# EAGLE board LiPo Charger-Balancer (EAGLE 4.11)
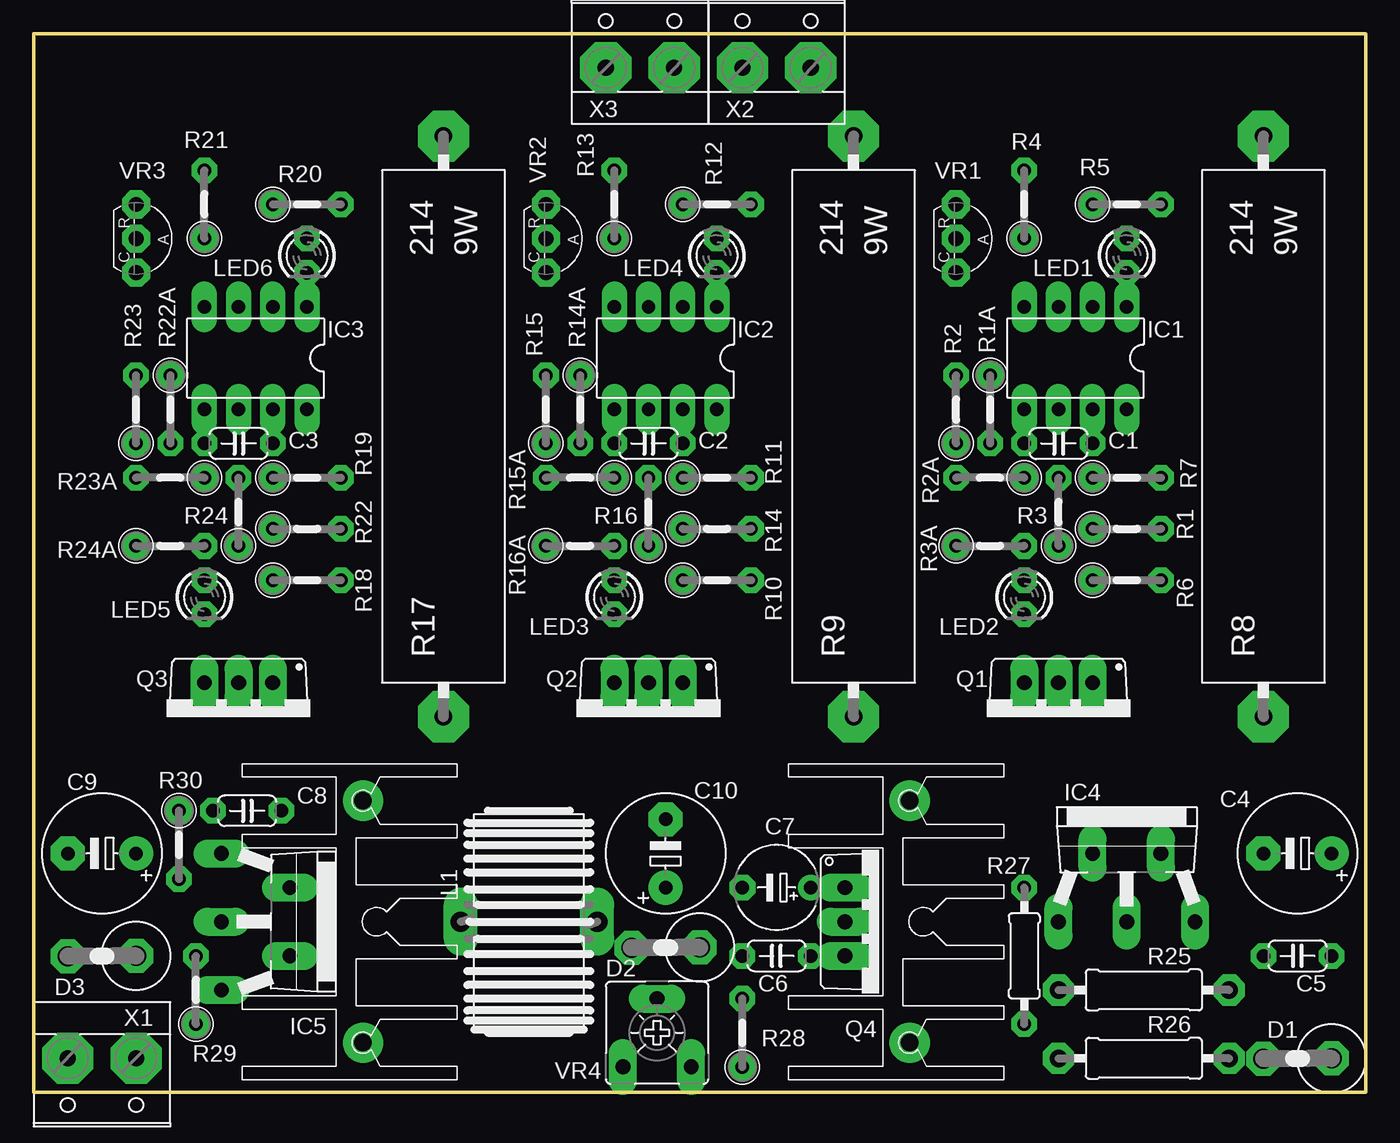
[diagram p0: board, top side]
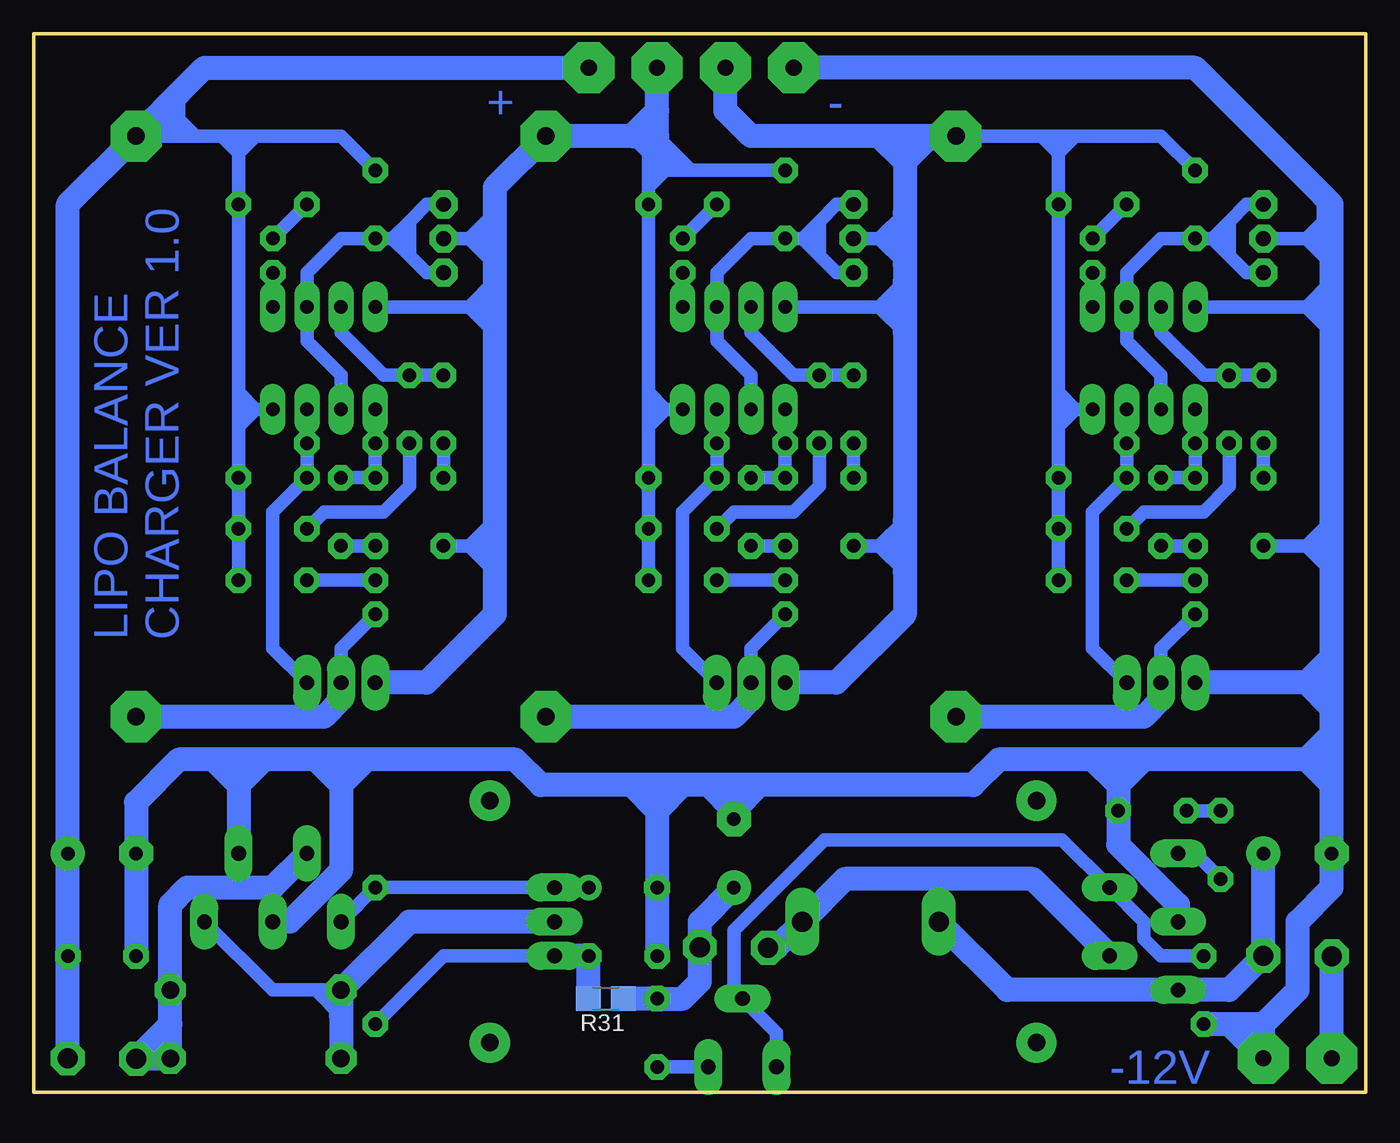
[diagram p1: board, bottom side, seen from below]

Size 99.06 x 78.74 mm. Coordinates in mm from the lower left corner, seen from the top.
Outline: 99.06,0 0,0 0,78.74 99.06,78.74 99.06,0
Copper layers (1*16): Top 0.035mm / dielectric 1.5mm / Bottom 0.035mm
Design rules "default": minimum track width 10mil, minimum drill 24mil, track to track 8mil, track to pad 8mil, pad to pad 8mil, via to via 8mil, smd to smd 8mil, copper to edge 0mil, drill to drill 8mil, minimum pad ring 10mil, minimum via ring 8mil, stop-mask expansion 4mil, vias tented up to drill 0mil, thermal gap 10mil

## Footprints (pad centres in the part's own frame; a part is rotated, then mirrored left to right if it is on the bottom)
C050-024X044 = drill 1 octagon: 1 -2.54,0; 2 2.54,0
E5-8,5 = drill 1 pad 2.54 round: + -2.54,0 | drill 1 pad 2.54 octagon: - 2.54,0
E5-6 = drill 1 pad 1.905 round: + -2.54,0 | drill 1 pad 1.905 octagon: - 2.54,0
RAD5G = drill 1.5 octagon: A 2.54,0.025; C -2.54,0
HEATSINK = drill 1.3 pad 3 round: G1 -9,-1; G2 9,-1
DIL08 = drill 1 long: 1 -3.81,-3.81; 2 -1.27,-3.81; 3 1.27,-3.81; 4 3.81,-3.81; 5 3.81,3.81; 6 1.27,3.81; 7 -1.27,3.81; 8 -3.81,3.81
TO220-5 = drill 1.1 long: 1 -5.08,-5.08; 2 -2.54,0; 3 0,-5.08; 4 2.54,0; 5 5.08,-5.08
SFT830S = drill 1.5 long: 1 -5.08,0; 2 5.08,0
LED3MM = drill 1 octagon: A -1.27,0; K 1.27,0
TO220BV = drill 1.1 long: D 0,-2.54; G -2.54,-2.54; S 2.54,-2.54
TO220AV = drill 1.1 long: B -2.54,-2.54; C 0,-2.54; E 2.54,-2.54
0207/5V = drill 1 octagon: 1 -2.54,0; 2 2.54,0
KH214-8 = drill 1.3 pad 3.81 octagon: 1 -21.59,0; 2 21.59,0
0309/12 = drill 1.3 octagon: 1 -6.35,0; 2 6.35,0
0207/10 = drill 1 octagon: 1 -5.08,0; 2 5.08,0
R1206 = smd 1.8 x 1.8: 1 -1.3,0; 2 1.3,0
TO92-CLP = drill 1.1 octagon: A 0,0; C 2.54,0; R -2.54,0
CA6V = drill 1.1 long: A -2.54,-2.54; E 2.54,-2.54; S 0,2.54
W237-132 = drill 1.2 pad 3.81 octagon: 1 -2.54,-0.635; 2 2.54,-0.635

## Placement (x,y rotation side)
C1  330n  [C050-024X044]  76.2,48.26 0 top
C2  330n  [C050-024X044]  45.72,48.26 0 top
C3  330n  [C050-024X044]  15.24,48.26 0 top
C4  10µF  [E5-8,5]  93.98,17.78 180 top
C5  100n  [C050-024X044]  93.98,10.16 180 top
C6  100n  [C050-024X044]  55.24,10.16 180 top
C7  10µF  [E5-6]  55.24,15.24 180 top
C8  100p  [C050-024X044]  15.88,20.95 0 top
C9  470µF  [E5-8,5]  5.08,17.78 180 top
C10  470µF  [E5-8,5]  46.99,17.78 90 top
D1  3A  [RAD5G]  93.98,2.54 180 top
D2  3A  [RAD5G]  46.99,10.79 180 top
D3  3A  [RAD5G]  5.08,10.16 180 top
HS1  [HEATSINK]  23.5,12.7 90 top
HS2  [HEATSINK]  64.14,12.7 90 top
IC1  LM2903N  [DIL08]  77.47,54.61 180 top
IC2  LM2903N  [DIL08]  46.99,54.61 180 top
IC3  LM2903N  [DIL08]  16.51,54.61 180 top
IC4  L200  [TO220-5]  81.28,17.78 0 top
IC5  LM2577T-ADJ  [TO220-5]  19.05,12.7 270 top
L1  150µH  [SFT830S]  36.83,12.7 0 top
LED1  RED  [LED3MM]  81.28,62.23 270 top
LED2  GREEN  [LED3MM]  73.66,36.83 270 top
LED3  GREEN  [LED3MM]  43.18,36.83 270 top
LED4  RED  [LED3MM]  50.8,62.23 270 top
LED5  GREEN  [LED3MM]  12.7,36.83 270 top
LED6  RED  [LED3MM]  20.32,62.23 270 top
Q1  IRFZ48N  [TO220BV]  76.2,27.94 180 top
Q2  IRFZ48N  [TO220BV]  45.72,27.94 180 top
Q3  IRFZ48N  [TO220BV]  15.24,27.94 180 top
Q4  BD912  [TO220AV]  62.87,12.7 270 top
R1  15k  [0207/5V]  81.28,41.91 0 top
R1A  22k  [0207/5V]  71.12,50.8 270 top
R2  22k  [0207/5V]  68.58,50.8 90 top
R2A  33k  [0207/5V]  71.12,45.72 180 top
R3  68k  [0207/5V]  76.2,43.18 90 top
R3A  68k  [0207/5V]  71.12,40.64 0 top
R4  120R  [0207/5V]  73.66,66.04 90 top
R5  120R  [0207/5V]  81.28,66.04 0 top
R6  120R  [0207/5V]  81.28,38.1 0 top
R7  10k  [0207/5V]  81.28,45.72 0 top
R8  2R2  [KH214-8]  91.44,49.53 90 top
R9  2R2  [KH214-8]  60.96,49.53 90 top
R10  120R  [0207/5V]  50.8,38.1 0 top
R11  10k  [0207/5V]  50.8,45.72 0 top
R12  120R  [0207/5V]  50.8,66.04 0 top
R13  120R  [0207/5V]  43.18,66.04 90 top
R14  15k  [0207/5V]  50.8,41.91 0 top
R14A  22k  [0207/5V]  40.64,50.8 270 top
R15  22k  [0207/5V]  38.1,50.8 90 top
R15A  33k  [0207/5V]  40.64,45.72 180 top
R16  68k  [0207/5V]  45.72,43.18 90 top
R16A  68k  [0207/5V]  40.64,40.64 0 top
R17  2R2  [KH214-8]  30.48,49.53 90 top
R18  120R  [0207/5V]  20.32,38.1 0 top
R19  10k  [0207/5V]  20.32,45.72 0 top
R20  120R  [0207/5V]  20.32,66.04 0 top
R21  120R  [0207/5V]  12.7,66.04 90 top
R22  15k  [0207/5V]  20.32,41.91 0 top
R22A  22k  [0207/5V]  10.16,50.8 270 top
R23  22k  [0207/5V]  7.62,50.8 90 top
R23A  33k  [0207/5V]  10.16,45.72 180 top
R24  68k  [0207/5V]  15.24,43.18 90 top
R24A  68k  [0207/5V]  10.16,40.64 0 top
R25  R25  [0309/12]  82.55,7.62 180 top
R26  R25  [0309/12]  82.55,2.54 180 top
R27  2R5  [0207/10]  73.66,10.16 90 top
R28  10k  [0207/5V]  52.7,4.45 90 top
R29  1k5  [0207/5V]  12.06,7.62 90 top
R30  820  [0207/5V]  10.79,18.41 270 top
R31  0R  [R1206]  56.52,6.99 180 bottom
VR1  [TO92-CLP]  68.58,63.5 270 top
VR2  [TO92-CLP]  38.1,63.5 270 top
VR3  [TO92-CLP]  7.62,63.5 270 top
VR4  10k  [CA6V]  46.35,4.45 0 top
X1  [W237-132]  5.08,1.91 180 top
X2  [W237-132]  55.24,76.83 0 top
X3  [W237-132]  45.09,76.83 0 top

## Library data of the parts
C1-C10 D1-D3 HS1 HS2 IC1-IC5 L1 LED1-LED6 Q1-Q4 R1 R1A R2 R2A R3 R3A R4-R14 R14A R15 R15A R16 R16A R17-R22 R22A R23 R23A R24 R24A R25-R31 VR1-VR4 X1-X3 = LiPo Charger-Balancer

## Nets
BAT+: D3.A X1.2
CT1: IC1.4 IC2.8 Q1.S R3A.1 R9.2 R10.2 R11.2 R12.2 R13.2 R14.2 VR1.A X2.1
CT2: IC2.4 IC3.8 Q2.S R16A.1 R17.2 R18.2 R19.2 R20.2 R21.2 R22.2 VR2.A X3.2
N$1: IC1.2 IC1.6 R4.1 VR1.C VR1.R
N$2: C1.2 IC1.7 Q1.G R7.1
N$3: LED2.K Q1.D R8.1
N$4: IC2.2 IC2.6 R13.1 VR2.C VR2.R
N$5: LED2.A R6.1
N$6: C2.2 IC2.7 Q2.G R11.1
N$7: C1.1 IC1.5 R2A.1 R3.2
N$8: IC1.1 LED1.K
N$9: R1.1 R1A.2
N$10: LED1.A R5.1
N$11: IC1.3 R1A.1 R2.2
N$12: R2.1 R2A.2
N$13: R3.1 R3A.2
N$14: LED3.K Q2.D R9.1
N$15: LED3.A R10.1
N$16: C2.1 IC2.5 R15A.1 R16.2
N$17: IC2.1 LED4.K
N$18: LED4.A R12.1
N$19: R14.1 R14A.2
N$20: IC2.3 R14A.1 R15.2
N$21: R15.1 R15A.2
N$22: R16.1 R16A.2
N$23: IC3.2 IC3.6 R21.1 VR3.C VR3.R
N$24: C3.2 IC3.7 Q3.G R19.1
N$25: LED5.K Q3.D R17.1
N$26: LED5.A R18.1
N$27: C3.1 IC3.5 R23A.1 R24.2
N$28: IC3.1 LED6.K
N$29: LED6.A R20.1
N$30: R22.1 R22A.2
N$31: IC3.3 R22A.1 R23.2
N$32: R23.1 R23A.2
N$33: R24.1 R24A.2
N$34: C7.+ IC4.1 Q4.B R27.2
N$35: D1.A IC4.2 R25.1 R26.1
N$36: IC4.5 Q4.C R25.2 R26.2
N$37: R28.1 VR4.E
N$38: C9.+ D3.C IC5.5 L1.1
N$39: D2.A IC5.4 L1.2
N$40: IC5.2 R29.2 VR4.A VR4.S
N$41: C10.+ D2.C R28.2 R31.1
N$42: C6.1 Q4.E R27.1 R31.2
N$44: IC5.1 R30.2
N$45: C8.1 R30.1
V+: C4.+ C5.1 D1.C IC1.8 R1.2 R4.2 R5.2 R6.2 R7.2 R8.2 X2.2
V-: C4.- C5.2 C6.2 C7.- C8.2 C9.- C10.- IC3.4 IC4.3 IC4.4 IC5.3 Q3.S R24A.1 R29.1 VR3.A X1.1 X3.1

## Tracks (layer width: path | path; a pad name or v marks a point on that pad's centre or on a via)
BAT+
  Bottom 1.016: D3.A 2.54,10.16
  Bottom 1.778: X1.2 D3.A
CT1
  Bottom 1.016: R10.2 R14.2 R11.2 53.34,49.53 | 53.34,49.53 53.34,50.8 | 53.34,50.8 52.07,50.8 | 52.07,50.8 IC2.8 | 53.34,50.8 53.34,52.07 | 53.34,52.07 R12.2 53.34,67.31 | 53.34,68.58 52.07,68.58 | 52.07,68.58 51.44,68.58 | 51.44,68.58 50.16,68.58 | 53.34,68.58 53.34,69.85 | 53.34,69.85 53.34,70.48 | 53.34,70.48 52.7,71.12 50.16,68.58 | 53.34,67.31 53.34,68.58 | 64.77,63.5 66.67,63.5 | 64.77,58.42 66.67,58.42 | 66.67,58.42 IC1.4 | 64.77,40.64 R3A.1 66.67,40.64 | 64.77,60.33 66.67,58.42 | 66.67,58.42 64.77,56.52 | 64.77,65.41 66.67,63.5 | 66.67,63.5 VR1.A | 66.67,63.5 64.77,61.59 | 64.77,42.55 66.67,40.64 | 66.67,40.64 64.77,38.73 | 52.07,68.58 53.34,69.85 | 51.44,68.58 53.34,70.48 | 50.16,68.58 R13.2 | 53.34,67.31 52.07,68.58 | 53.34,69.85 54.61,71.12 | 52.07,50.8 53.34,52.07 | 53.34,49.53 52.07,50.8
  Bottom 1.778: 54.61,71.12 52.7,71.12 52.7,73.03 | 54.61,71.12 R9.2 64.77,67.31 64.77,65.41 64.77,63.5 64.77,61.59 64.77,60.33 64.77,58.42 64.77,56.52 64.77,42.55 64.77,40.64 64.77,38.73 64.77,35.56 69.85,30.48 Q1.S | 52.7,73.03 X2.1 | 54.61,71.12 52.7,73.03
CT2
  Bottom 1.016: 22.86,50.8 22.86,52.07 | 22.86,52.07 R20.2 22.86,69.85 | 22.86,49.53 R19.2 R22.2 R18.2 | 22.86,49.53 22.86,50.8 | 22.86,50.8 21.59,50.8 | 21.59,50.8 IC3.8 | 22.86,69.85 22.86,71.12 | 22.86,71.12 21.59,71.12 | 21.59,71.12 15.24,71.12 R21.2 | 22.86,71.12 24.13,71.12 | 24.13,71.12 R17.2 | 34.29,58.42 36.2,58.42 | 36.2,58.42 IC2.4 | 34.29,40.64 36.2,40.64 | 36.2,40.64 R16A.1 | 34.29,63.5 36.2,63.5 | 36.2,63.5 VR2.A | 22.86,69.85 21.59,71.12 | 22.86,69.85 24.13,71.12 | 34.29,65.41 36.2,63.5 | 36.2,63.5 34.29,61.59 | 34.29,60.33 36.2,58.42 | 36.2,58.42 34.29,56.52 | 34.29,42.55 36.2,40.64 | 36.2,40.64 34.29,38.73 | 21.59,50.8 22.86,52.07 | 22.86,49.53 21.59,50.8
  Bottom 1.778: 34.29,71.12 34.29,69.22 | 34.29,69.22 34.29,65.41 34.29,63.5 34.29,61.59 34.29,60.33 34.29,58.42 34.29,56.52 34.29,42.55 34.29,40.64 34.29,38.73 34.29,35.56 39.37,30.48 Q2.S | R17.2 32.38,71.12 | 32.38,71.12 34.29,71.12 | X3.2 47.62,73.03 45.72,71.12 36.2,71.12 | 34.29,71.12 36.2,71.12 | 32.38,71.12 34.29,69.22 | 34.29,69.22 36.2,71.12
N$1
  Bottom 1.016: 72.39,63.5 R4.1 76.2,63.5 78.74,60.96 IC1.2 78.74,55.88 76.2,53.34 IC1.6 | 72.39,63.5 71.12,63.5 | 71.12,63.5 71.12,64.77 | 71.12,64.77 69.85,66.04 VR1.R | 71.12,63.5 71.12,62.23 | 71.12,62.23 69.85,60.96 VR1.C | 72.39,63.5 71.12,64.77 | 72.39,63.5 71.12,62.23
N$2
  Bottom 1.016: IC1.7 C1.2 R7.1 81.28,43.18 81.28,33.02 Q1.G
N$3
  Bottom 1.016: Q1.D 76.2,33.02 LED2.K
  Bottom 1.778: R8.1 77.47,27.94 76.2,29.21 Q1.D
N$4
  Bottom 1.016: 41.91,63.5 R13.1 45.72,63.5 48.26,60.96 IC2.2 48.26,55.88 45.72,53.34 IC2.6 | 41.91,63.5 40.64,63.5 | 40.64,63.5 40.64,64.77 | 40.64,64.77 39.37,66.04 VR2.R | 40.64,63.5 40.64,62.23 | 40.64,62.23 39.37,60.96 VR2.C | 41.91,63.5 40.64,64.77 | 41.91,63.5 40.64,62.23
N$5
  Bottom 1.016: LED2.A R6.1
N$6
  Bottom 1.016: IC2.7 C2.2 R11.1 50.8,43.18 50.8,33.02 Q2.G
N$7
  Bottom 1.016: IC1.5 C1.1 R2A.1 R3.2
N$8
  Bottom 1.016: IC1.1 LED1.K
N$9
  Bottom 1.016: R1.1 77.47,43.18 73.03,43.18 71.12,45.09 R1A.2
N$10
  Bottom 1.016: R5.1 LED1.A
N$11
  Bottom 1.016: R2.2 R1A.1 73.03,53.34 76.2,56.52 IC1.3
N$12
  Bottom 1.016: R2A.2 R2.1
N$13
  Bottom 1.016: R3A.2 R3.1
N$14
  Bottom 1.016: Q2.D 45.72,33.02 LED3.K
  Bottom 1.778: R9.1 46.99,27.94 45.72,29.21 Q2.D
N$15
  Bottom 1.016: LED3.A R10.1
N$16
  Bottom 1.016: IC2.5 C2.1 R15A.1 R16.2
N$17
  Bottom 1.016: IC2.1 LED4.K
N$18
  Bottom 1.016: R12.1 LED4.A
N$19
  Bottom 1.016: R14A.2 40.64,45.09 42.55,43.18 46.99,43.18 R14.1
N$20
  Bottom 1.016: IC2.3 45.72,56.52 42.55,53.34 R14A.1 R15.2
N$21
  Bottom 1.016: R15A.2 R15.1
N$22
  Bottom 1.016: R16A.2 R16.1
N$23
  Bottom 1.016: IC3.6 15.24,53.34 17.78,55.88 IC3.2 17.78,60.96 15.24,63.5 R21.1 11.43,63.5 | 11.43,63.5 10.16,63.5 | 10.16,63.5 10.16,64.77 | 10.16,64.77 8.89,66.04 VR3.R | 10.16,63.5 10.16,62.23 | 10.16,62.23 8.89,60.96 VR3.C | 11.43,63.5 10.16,64.77 | 11.43,63.5 10.16,62.23
N$24
  Bottom 1.016: IC3.7 C3.2 R19.1 20.32,43.18 20.32,33.02 Q3.G
N$25
  Bottom 1.016: Q3.D 15.24,33.02 LED5.K
  Bottom 1.778: R17.1 16.51,27.94 15.24,29.21 Q3.D
N$26
  Bottom 1.016: LED5.A R18.1
N$27
  Bottom 1.016: R24.2 R23A.1 C3.1 IC3.5
N$28
  Bottom 1.016: IC3.1 LED6.K
N$29
  Bottom 1.016: R20.1 LED6.A
N$30
  Bottom 1.016: R22.1 16.51,43.18 12.06,43.18 10.16,45.09 R22A.2
N$31
  Bottom 1.016: IC3.3 15.24,56.52 12.06,53.34 R22A.1 R23.2
N$32
  Bottom 1.016: R23A.2 R23.1
N$33
  Bottom 1.016: R24A.2 R24.1
N$34
  Bottom 1.016: IC4.1 R27.2 Q4.B C7.+
N$35
  Bottom 1.016: D1.A 91.44,2.54
  Bottom 1.778: IC4.2 81.28,15.24 87.63,15.24 88.9,13.97 R25.1 88.9,5.08 | 88.9,5.08 R26.1 91.44,2.54 88.9,5.08
N$36
  Bottom 1.016: IC4.5 81.28,7.62 78.11,7.62 | R25.2 78.11,7.62 | 78.11,7.62 76.2,5.71
  Bottom 1.778: R26.2 76.2,5.71 R25.2 71.12,12.7 Q4.C
N$37
  Bottom 1.016: VR4.E R28.1
N$38
  Bottom 1.778: C9.+ D3.C 10.16,7.62 IC5.5 26.67,7.62 L1.1
N$39
  Bottom 0.406: 44.45,10.79 D2.A
  Bottom 1.778: 44.45,10.79 43.81,10.79 L1.2 38.73,15.88 24.77,15.88 IC5.4
N$40
  Bottom 1.016: R29.2 15.24,10.16 16.51,11.43 16.51,12.7 IC5.2 22.61,18.8 40.26,18.8 46.99,12.06 46.99,7.62 VR4.S 43.81,4.45 VR4.A
N$41
  Bottom 1.778: R31.1 R28.2 50.8,6.99 49.53,8.26 D2.C 49.53,12.7 C10.+
N$42
  Bottom 0.406: 57.81,10.13 C6.1
  Bottom 1.016: R27.1 68.58,10.16 Q4.E C6.1
  Bottom 1.778: C6.1 Q4.E | C6.1 Q4.E | C6.1 Q4.E | R31.2 57.81,10.13
N$44
  Bottom 1.016: R30.2 12.7,17.78 IC5.1
N$45
  Bottom 1.016: R30.1 C8.1
V+
  Bottom 1.016: 83.82,71.12 83.82,69.85 | 83.82,69.85 R5.2 83.82,52.07 | 83.82,71.12 82.55,71.12 | 82.55,71.12 76.2,71.12 R4.2 | R8.2 88.9,71.12 | 88.9,71.12 88.27,71.12 | 88.27,71.12 87,71.12 | 87,71.12 85.09,71.12 | 85.09,71.12 83.82,71.12 | R6.2 R1.2 R7.2 83.82,49.53 | 83.82,52.07 83.82,50.8 | 83.82,50.8 83.82,49.53 | 83.82,50.8 82.55,50.8 | 82.55,50.8 IC1.8 | 83.82,69.85 82.55,71.12 | 85.09,71.12 83.82,69.85 | 83.82,52.07 82.55,50.8 | 82.55,50.8 83.82,49.53 | 88.9,71.12 90.17,72.39 | 88.9,71.12 88.9,73.66 | 88.27,71.12 88.27,72.39 | 88.27,72.39 88.27,74.3 | 87,71.12 88.27,72.39
  Bottom 1.778: D1.C C5.1 C4.+ 96.52,66.04 R8.2 90.17,72.39 88.9,73.66 88.27,74.3 86.36,76.2 X2.2
V-
  Bottom 1.016: 2.54,63.5 3.17,63.5 | 4.45,63.5 3.17,63.5 | 4.45,63.5 VR3.A | 2.54,58.42 4.45,58.42 | 4.45,58.42 IC3.4 | 2.54,40.64 4.45,40.64 | 4.45,40.64 R24A.1 | 4.45,40.64 2.54,42.55 | 2.54,38.73 4.45,40.64 | 4.45,58.42 2.54,60.33 | 2.54,56.52 4.45,58.42 | 4.45,63.5 2.54,65.41 | 2.54,61.59 4.45,63.5 | 3.17,63.5 3.17,66.67 | 18.41,24.77 18.41,22.86
  Bottom 1.778: 2.54,30.48 4.45,30.48 | 4.45,30.48 Q3.S | 2.54,30.48 2.54,33.02 | 2.54,33.02 2.54,38.73 2.54,40.64 2.54,42.55 2.54,56.52 2.54,58.42 2.54,60.33 2.54,61.59 2.54,63.5 2.54,65.41 2.54,66.04 3.17,66.67 12.7,76.2 X3.1 | IC4.3 80.01,12.7 76.2,16.51 76.2,22.86 | 76.2,24.77 76.2,22.86 | 76.2,24.77 78.11,24.77 | 78.11,24.77 81.92,24.77 | 81.92,24.77 83.82,24.77 | 83.82,24.77 83.82,22.86 | 52.7,22.86 54.61,22.86 | 54.61,22.86 61.34,22.86 63.25,24.77 74.3,24.77 | 74.3,24.77 76.2,24.77 | 46.99,22.86 48.9,22.86 | 48.9,22.86 50.8,22.86 | 50.8,22.86 52.7,22.86 | 20.32,24.77 18.41,24.77 16.51,24.77 | 20.32,24.77 27.3,24.77 29.21,22.86 45.09,22.86 | 45.09,22.86 46.99,22.86 | 46.99,22.86 46.99,20.95 | 46.99,20.95 C10.- | 2.54,22.86 2.54,26.67 | 2.54,26.67 2.54,28.57 | 2.54,28.57 2.54,30.48 | C5.2 C4.- 91.44,21.59 88.27,24.77 85.72,24.77 | 83.82,24.77 85.72,24.77 | 52.7,22.86 52.7,20.95 | 52.7,20.95 C7.- C6.2 | 7.62,5.08 X1.1 10.16,5.08 | 7.62,5.08 5.08,7.62 5.08,12.7 2.54,15.24 C9.- 2.54,22.86 | 7.62,5.08 10.16,5.08 | 10.16,5.08 R29.1 | 4.45,24.77 16.51,24.77 | 83.82,22.86 85.72,24.77 | 83.82,22.86 IC4.4 | 81.92,24.77 83.82,22.86 | 74.3,24.77 76.2,22.86 | 76.2,22.86 78.11,24.77 | 50.8,22.86 52.7,20.95 | 52.7,20.95 54.61,22.86 | 2.54,26.67 4.45,24.77 | 2.54,22.86 4.45,24.77 | 2.54,33.02 2.54,32.38 4.45,30.48 | 2.54,28.57 4.45,30.48 | 46.99,20.95 48.9,22.86 | 45.09,22.86 46.99,20.95 | IC5.3 13.97,13.97 18.41,18.41 C8.2 18.41,22.86 | 16.51,24.77 18.41,22.86 | 18.41,22.86 20.32,24.77

## Text on the board
Bottom: - | + | CHARGER VER 1.0 | LIPO BALANCE | -12V